# Altium PCB lagd_pcb.PcbDoc (part 3 of 7)
Units mm, origin at the board's own origin, x right, y up, seen from the top; angles counter-clockwise.
Board outline 172 x 145 mm, 6 copper layers (Top Layer, Layer 1, Layer 2, Layer 3, Layer 4, Bottom Layer), stack 0.816 mm thick; 588 components, 338 nets, 2165 pads, 565 vias.
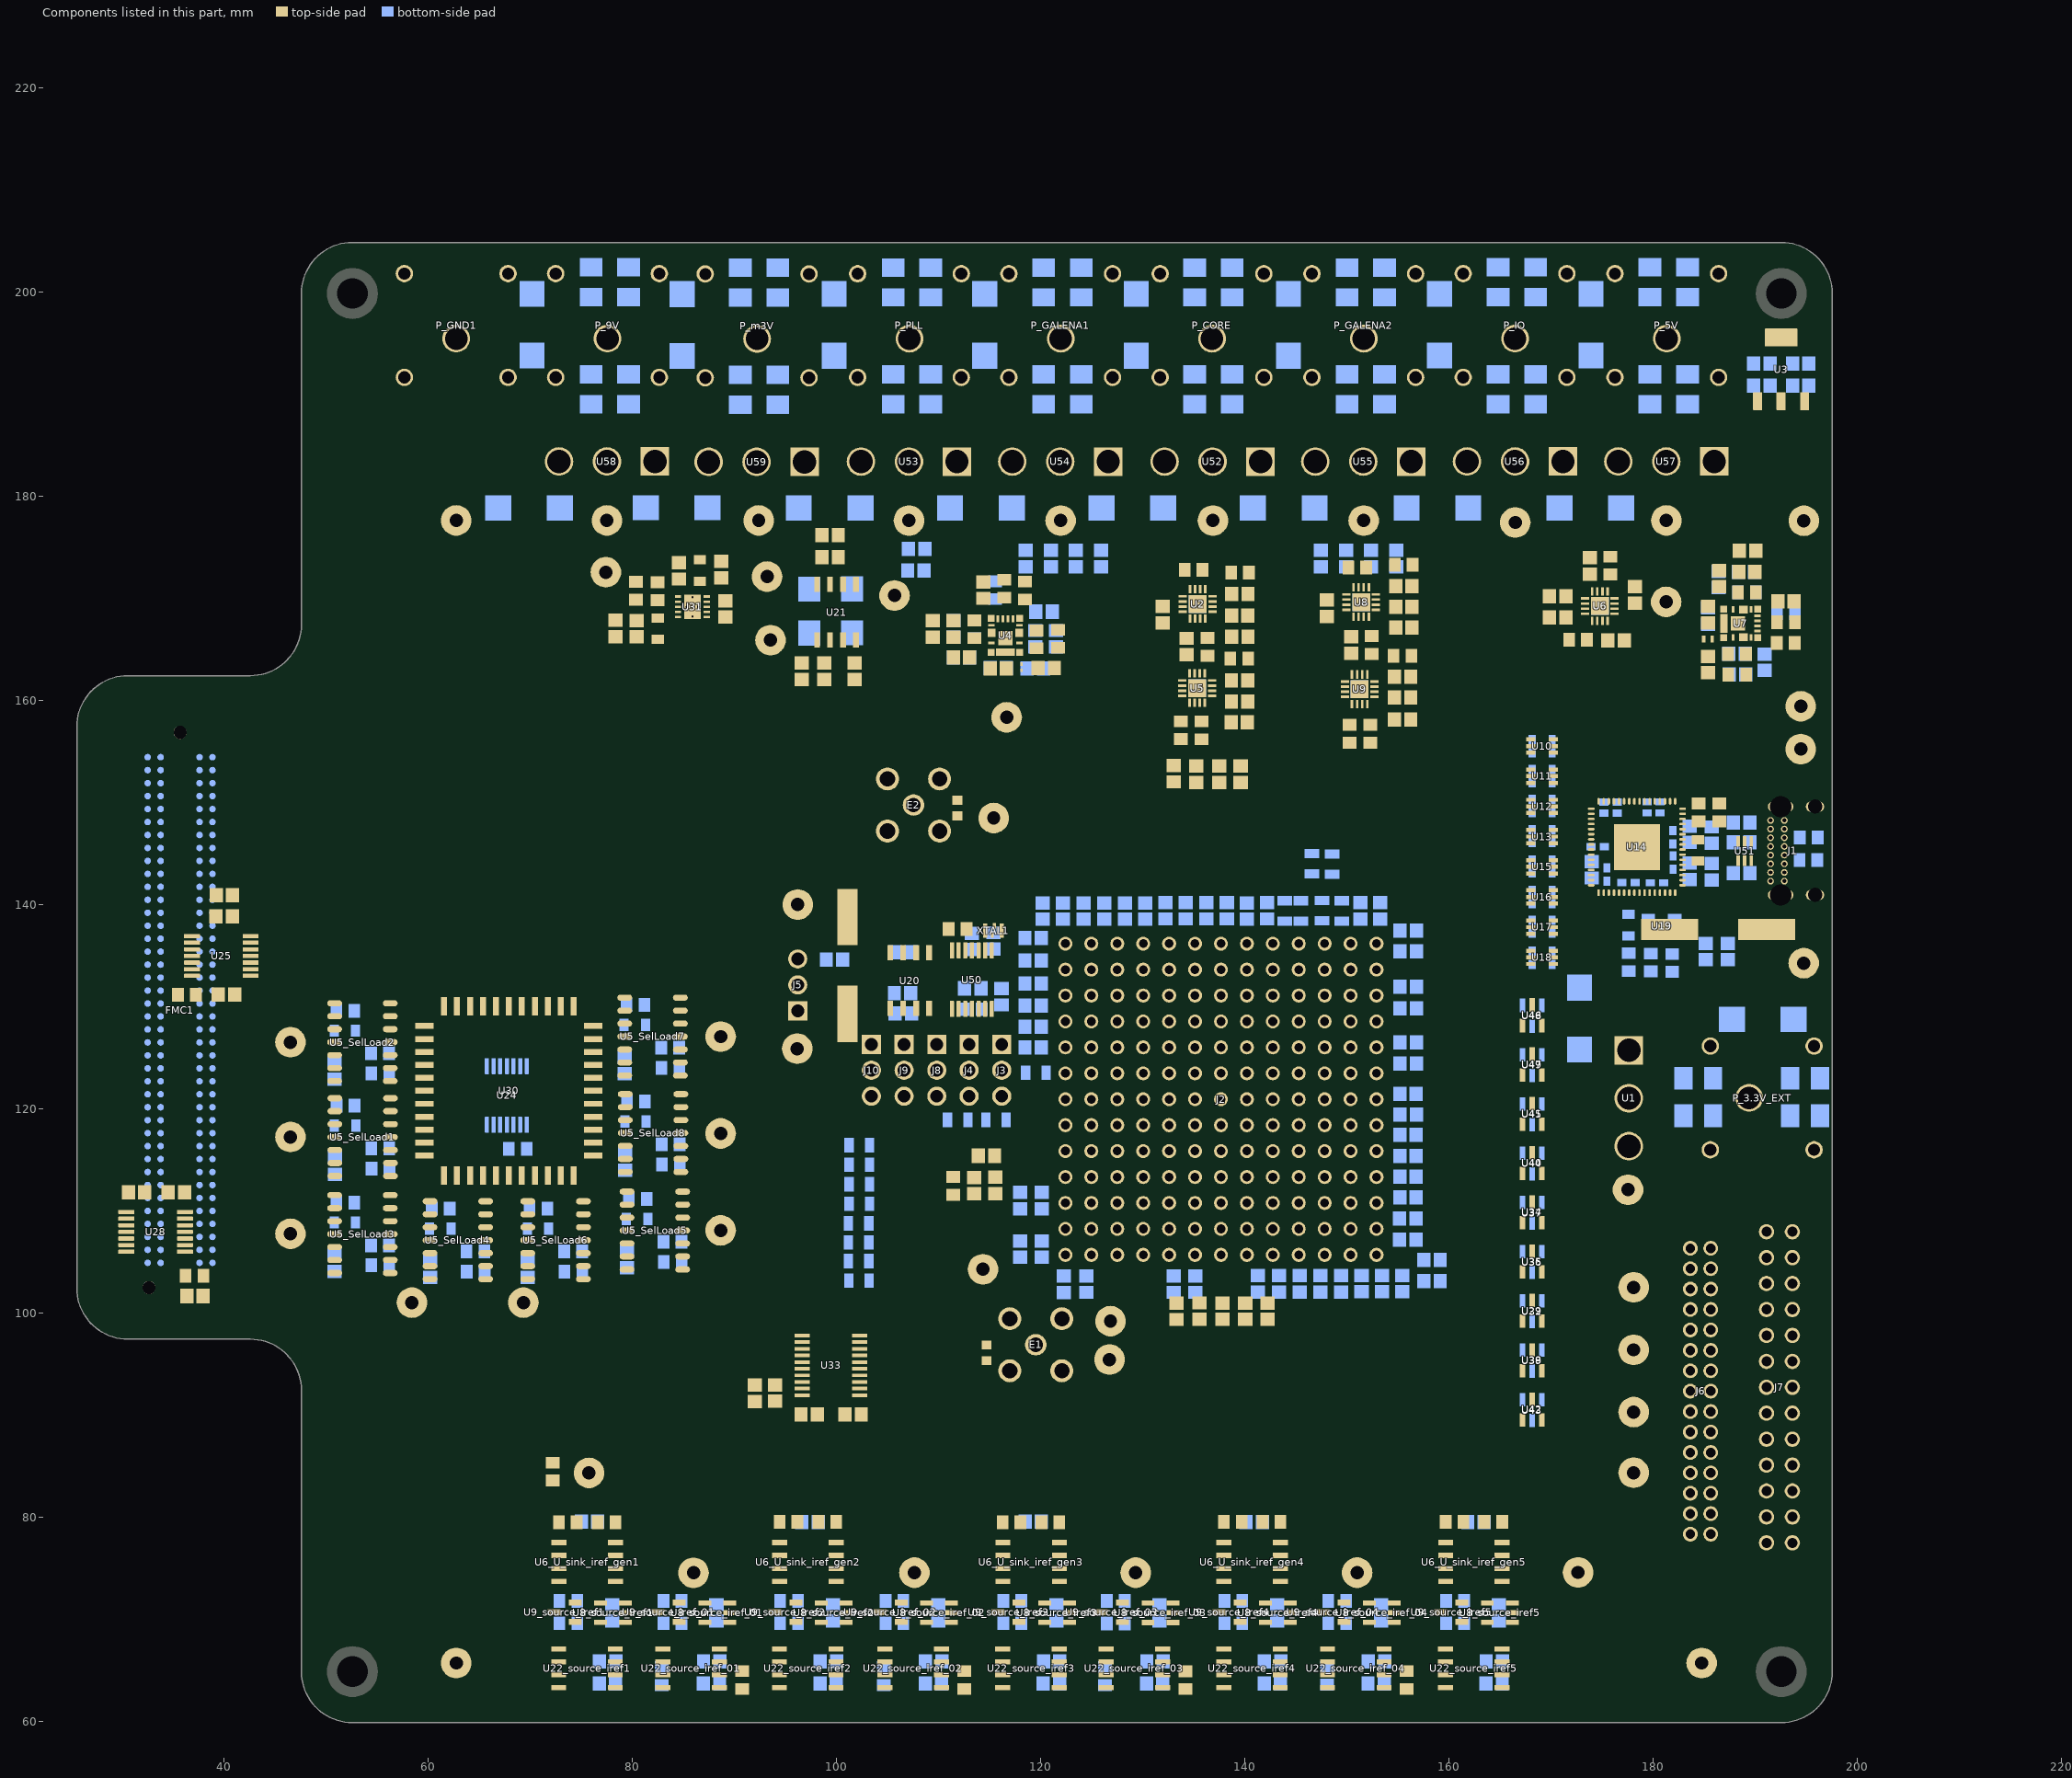
[diagram p6: the components of this part, seen from the top]

## Part data (continued)
J7: "Description", Manufacturer_Name=Sullins, Copyright="Copyright (C) 2025 Ultra Librarian. All rights reserved.", Manufacturer_Part_Number=SBH11-PBPC-D13-ST-BK, RefDes=RefDes, Type=Type
L1: library part LQP03TNR12J02D, "FIXED IND 120NH 40MA 12 OHM SMD", Current Rating (Amps)="80 mA", DC Resistance (DCR)="12Ohm Max", Device Package="0201 (0603 Metric)", Frequency - Self Resonant=800MHz, Inductance Frequency - Test="300 MHz", MANUFACTURER="Murata Electronics", Operating Temperature="-55°C ~ 125°C", Q @ Freq="8 @ 300MHz", Supplier Part Number 1=490-8430-1-ND, Tolerance=±5%, ComponentLink1Description=Datasheet, ComponentLink1URL=https://search.murata.co.jp/Ceramy/image/img/P02/JELF243C-0015.pdf, ComponentLink2Description="DigiKey Link", ComponentLink2URL=https://www.digikey.com/en/products/detail/murata-electronics/LQP03TNR12J02D/2391767, Height - Seated (Max)="0.013\" (0.33mm)", Inductance="120 nH", lastupdated="4/5/2026 8:47:40 PM", Lifecycle Status=Active, Material - Core=Non-Magnetic, Minimum Order=1, Mounting Type="Surface Mount", Package / Case="0201 (0603 Metric)", packaging=TapeAndReel, PART NUMBER=LQP03TNR12J02D, Part Status=Active, partid=615, Price=0.01, series=LQP03, Shielding=Unshielded, Size / Dimension="0.024\" L x 0.012\" W (0.60mm x 0.30mm)", Supplier 1=DigiKey, Supplier Device Package="0201 (0603 Metric)", Type="Thick Film"
L2: library part LQW15CNR33J10D, "FIXED IND 330NH 390MA 0.56OHM SM", Current Rating (Amps)="390 mA", DC Resistance (DCR)="560mOhm Max", Device Package="0402 (1005 Metric)", Frequency - Self Resonant=520MHz, Inductance Frequency - Test="100 MHz", MANUFACTURER="Murata Electronics", Operating Temperature="-55°C ~ 125°C", Supplier Part Number 1=490-16892-1-ND, Tolerance=±5%, ComponentLink1Description=Datasheet, ComponentLink1URL=https://search.murata.co.jp/Ceramy/image/img/P02/JELF243A-0096.pdf, ComponentLink2Description="DigiKey Link", ComponentLink2URL=https://www.digikey.com/en/products/detail/murata-electronics/LQW15CNR33J10D/4906006, Height - Seated (Max)="0.024\" (0.60mm)", Inductance="330 nH", lastupdated="4/5/2026 9:07:19 PM", Lifecycle Status=Active, Material - Core=Ferrite, Minimum Order=1, Mounting Type="Surface Mount", Package / Case="0402 (1005 Metric)", packaging=TapeAndReel, PART NUMBER=LQW15CNR33J10D, Part Status=Active, partid=435, Price=0.17, series=LQW15, Shielding=Unshielded, Size / Dimension="0.039\" L x 0.024\" W (1.00mm x 0.60mm)", Supplier 1=DigiKey, Type="Drum Core, Wirewound"
P_3.3V_EXT P_5V P_9V P_CORE P_GALENA1 P_GALENA2 P_GND1 P_IO P_m3V P_PLL: "Description", Manufacturer_Name=Cliff, Copyright="Copyright (C) 2026 Ultra Librarian. All rights reserved.", Manufacturer_Part_Number=FCR7350R, RefDes=RefDes, Type=Type
R1 R39 R42 R43 R78 R80 R81 R82 R83 R84 R85 R86 R87 R88 R89 R90 R91: "0 Ohms Jumper 0.125W, 1/8W Chip Resistor 0805 (2012 Metric) Automotive AEC-Q200 Thick Film", Package="2012 Vishay", Check_prices=https://www.snapeda.com/parts/CRCW08050000ZSTA/Vishay+Dale/view-part/?ref=eda, MF="Vishay Dale", MP=CRCW08050000ZSTA, SnapEDA_Link=https://www.snapeda.com/parts/CRCW08050000ZSTA/Vishay+Dale/view-part/?ref=snap
R2 R79: "Resistor,Thick Film,50 Ohms,0.1 W,1%,SMT,0603,TCR 37 ppm/DegC,Cut Tape", Package=Package, Check_prices=https://www.snapeda.com/parts/CRCW060350R0FKEA/Vishay/view-part/?ref=eda, MF="Vishay Intertechnology", MP=CRCW060350R0FKEA, SnapEDA_Link=https://www.snapeda.com/parts/CRCW060350R0FKEA/Vishay/view-part/?ref=snap
R3_SelLoad1 R3_SelLoad2 R3_SelLoad3 R3_SelLoad4 R3_SelLoad5 R3_SelLoad6 R3_SelLoad7 R3_SelLoad8: library part AC0805FR-7W1ML, "RES 1 MOHM 1% 1/4W 0805", Device Package="0805 (2012 Metric)", MANUFACTURER=Yageo, Operating Temperature="-55°C ~ 155°C", Power (Watts)="0.25W, 1/4W", Ratings=AEC-Q200, Supplier Device Package=0805, Supplier Part Number 1=13-AC0805FR-7W1MLCT-ND, Temperature Coefficient=±100ppm/°C, Tolerance=±1%, ComponentLink1Description=Datasheet, ComponentLink1URL=https://www.yageo.com/upload/media/product/productsearch/datasheet/rchip/PYu-AC_51_RoHS_L_9.pdf, ComponentLink2Description="DigiKey Link", ComponentLink2URL=https://www.digikey.com/en/products/detail/yageo/AC0805FR-7W1ML/16982127, Composition="Thick Film", Features="Automotive AEC-Q200, Moisture Resistant", Height - Seated (Max)="0.024\" (0.60mm)", lastupdated="4/5/2026 9:17:50 PM", Lifecycle Status=Active, Minimum Order=1, Number of Terminations=2, Package / Case="0805 (2012 Metric)", packaging=TapeAndReel, PART NUMBER=AC0805FR-7W1ML, Part Status=Active, partid=76421, Price=0.01, Resistance="1 MOhms", series=AC, Size / Dimension="0.079\" L x 0.049\" W (2.00mm x 1.25mm)", Supplier 1=DigiKey
R4_SelLoad1 R4_SelLoad2 R4_SelLoad3 R4_SelLoad4 R4_SelLoad5 R4_SelLoad6 R4_SelLoad7 R4_SelLoad8 R19 R28 R32: library part 3430A2F100KTDF, "3430 A2 1% 100K 100PPM 1K RL", Device Package="0805 (2012 Metric)", MANUFACTURER="TE Connectivity Passive Product", Operating Temperature="-55°C ~ 155°C", Power (Watts)=1W, Ratings=AEC-Q200, Supplier Device Package=0508, Supplier Part Number 1=1712-3430A2F100KTDFCT-ND, Temperature Coefficient=±100ppm/°C, Tolerance=±1%, ComponentLink1Description=Datasheet, ComponentLink1URL=https://www.te.com/usa-en/product-4-2176559-1.datasheet.pdf, ComponentLink2Description="DigiKey Link", ComponentLink2URL=https://www.digikey.com/en/products/detail/te-connectivity-passive-product/3430A2F100KTDF/17763668, Composition="Thick Film", Features="Automotive AEC-Q200", Height - Seated (Max)="0.026\" (0.65mm)", lastupdated="4/5/2026 8:08:27 PM", Lifecycle Status=Active, Minimum Order=1, Number of Terminations=2, Package / Case="0805 (2012 Metric)", packaging=TapeAndReel, PART NUMBER=3430A2F100KTDF, Part Status=Active, partid=78438, Price=0.02, Resistance="100 kOhms", series=3430, Size / Dimension="0.049\" L x 0.079\" W (1.25mm x 2.00mm)", Supplier 1=DigiKey
R5_SelLoad1 R5_SelLoad2 R5_SelLoad3 R5_SelLoad4 R5_SelLoad5 R5_SelLoad6 R5_SelLoad7 R5_SelLoad8 R40 R41 R44 R46 R77: library part 3430A2F10KTDF, "3430 A2 1% 10K 100PPM 1K RL", Device Package="0805 (2012 Metric)", MANUFACTURER="TE Connectivity Passive Product", Operating Temperature="-55°C ~ 155°C", Power (Watts)=1W, Ratings=AEC-Q200, Supplier Device Package=0508, Supplier Part Number 1=1712-3430A2F10KTDFCT-ND, Temperature Coefficient=±100ppm/°C, Tolerance=±1%, ComponentLink2Description="DigiKey Link", ComponentLink2URL=https://www.digikey.com/en/products/detail/te-connectivity-passive-product/3430A2F10KTDF/17764190, Composition="Thick Film", Features="Automotive AEC-Q200", Height - Seated (Max)="0.026\" (0.65mm)", lastupdated="4/5/2026 8:08:30 PM", Lifecycle Status=Active, Minimum Order=1, Number of Terminations=2, Package / Case="0805 (2012 Metric)", packaging=TapeAndReel, PART NUMBER=3430A2F10KTDF, Part Status=Active, partid=77781, Price=0.02, Resistance="10 kOhms", series=3430, Size / Dimension="0.049\" L x 0.079\" W (1.25mm x 2.00mm)", Supplier 1=DigiKey
R6_SelLoad1 R6_SelLoad2 R6_SelLoad3 R6_SelLoad4 R6_SelLoad5 R6_SelLoad6 R6_SelLoad7 R6_SelLoad8 R31: library part CHP0805AFX-1001ELF, "RESHIGHPOWERA 0805 1K 1% 1/2W TC", Device Package="0805 (2012 Metric)", MANUFACTURER="Bourns Inc.", Operating Temperature="-55°C ~ 155°C", Power (Watts)="0.5W, 1/2W", Ratings=AEC-Q200, Supplier Device Package=0805, Supplier Part Number 1=118-CHP0805AFX-1001ELFCT-ND, Temperature Coefficient=±100ppm/°C, Tolerance=±1%, ComponentLink1Description=Datasheet, ComponentLink1URL=https://www.bourns.com/docs/product-datasheets/chp-a.pdf, ComponentLink2Description="DigiKey Link", ComponentLink2URL=https://www.digikey.com/en/products/detail/bourns-inc/CHP0805AFX-1001ELF/12144379, Composition="Thick Film", Features="Anti-Sulfur, Automotive AEC-Q200, Moisture Resistant, Pulse Withstanding", Height - Seated (Max)="0.024\" (0.60mm)", lastupdated="4/5/2026 8:09:01 PM", Lifecycle Status=Active, Minimum Order=1, Number of Terminations=2, Package / Case="0805 (2012 Metric)", packaging=TapeAndReel, PART NUMBER=CHP0805AFX-1001ELF, Part Status=Active, partid=66642, Price=0.08, Resistance="1 kOhms", series=CHP-A, Size / Dimension="0.079\" L x 0.049\" W (2.00mm x 1.25mm)", Supplier 1=DigiKey
R7_source_iref1 R7_source_iref2 R7_source_iref3 R7_source_iref4 R7_source_iref5 R7_source_iref_01 R7_source_iref_02 R7_source_iref_03 R7_source_iref_04: library part RCS0805100RFKEA, "RES SMD 100 OHM 1% 3/4W 0805", Device Package="0805 (2012 Metric)", MANUFACTURER="Vishay Dale", Operating Temperature="-55°C ~ 155°C", Power (Watts)="0.75W, 3/4W", Ratings=AEC-Q200, Supplier Device Package=0805, Supplier Part Number 1=541-2834-1-ND, Temperature Coefficient=±100ppm/°C, Tolerance=±1%, ComponentLink1Description=Datasheet, ComponentLink1URL=http://www.vishay.com/docs/20065/rcse3.pdf, ComponentLink2Description="DigiKey Link", ComponentLink2URL=https://www.digikey.com/en/products/detail/vishay-dale/RCS0805100RFKEA/5866980, Composition="Thick Film", Features="Automotive AEC-Q200, Pulse Withstanding", Height - Seated (Max)="0.020\" (0.50mm)", lastupdated="4/5/2026 8:11:26 PM", Lifecycle Status=Active, Minimum Order=1, Number of Terminations=2, Package / Case="0805 (2012 Metric)", packaging=TapeAndReel, PART NUMBER=RCS0805100RFKEA, Part Status=Active, partid=27784, Price=0.02, Resistance="100 Ohms", series="RCS e3", Size / Dimension="0.079\" L x 0.049\" W (2.00mm x 1.25mm)", Supplier 1=DigiKey
R8_source_iref1 R8_source_iref2 R8_source_iref3 R8_source_iref4 R8_source_iref5 R8_source_iref_01 R8_source_iref_02 R8_source_iref_03 R8_source_iref_04: library part RNCS0805BKE10K0, "RES 10K OHM 0.1% 1/10W 0805", Device Package="0805 (2012 Metric)", MANUFACTURER="Stackpole Electronics Inc", Operating Temperature="-55°C ~ 155°C", Power (Watts)="0.1W, 1/10W", Ratings=AEC-Q200, Supplier Device Package=0805, Supplier Part Number 1=RNCS0805BKE10K0CT-ND, Temperature Coefficient=±25ppm/°C, Tolerance=±0.1%, ComponentLink1Description=Datasheet, ComponentLink1URL=https://www.seielect.com/catalog/sei-rncs_rnch.pdf, ComponentLink2Description="DigiKey Link", ComponentLink2URL=https://www.digikey.com/en/products/detail/stackpole-electronics-inc/RNCS0805BKE10K0/1800067, Composition="Thin Film", Features="Anti-Corrosive, Automotive AEC-Q200, Moisture Resistant", Height - Seated (Max)="0.026\" (0.65mm)", lastupdated="4/5/2026 8:11:26 PM", Lifecycle Status=Active, Minimum Order=1, Number of Terminations=2, Package / Case="0805 (2012 Metric)", packaging=TapeAndReel, PART NUMBER=RNCS0805BKE10K0, Part Status=Active, partid=27713, Price=0.07, Resistance="10 kOhms", series=RNCS, Size / Dimension="0.079\" L x 0.049\" W (2.00mm x 1.25mm)", Supplier 1=DigiKey
R9 R13 R23 R27 R48 R50 R69 R70 R73: library part 560112120019, "RES 5.1K OHM 5% 1/4W 0805", Device Package="0805 (2012 Metric)", MANUFACTURER="Würth Elektronik", Operating Temperature="-55°C ~ 155°C", Power (Watts)="0.25W, 1/4W", Supplier Device Package=0805, Supplier Part Number 1=732-560112120019CT-ND, Temperature Coefficient=±100ppm/°C, Tolerance=±5%, ComponentLink1Description=Datasheet, ComponentLink1URL=https://www.we-online.com/katalog/datasheet/560112120019.pdf, ComponentLink2Description="DigiKey Link", ComponentLink2URL=https://www.digikey.com/en/products/detail/würth-elektronik/560112120019/22230497, Composition="Thick Film", Features=Anti-Sulfur, Height - Seated (Max)="0.026\" (0.65mm)", lastupdated="4/6/2026 8:09:43 PM", Lifecycle Status=Active, Minimum Order=1, Number of Terminations=2, Package / Case="0805 (2012 Metric)", packaging=TapeAndReel, PART NUMBER=560112120019, partid=95975, Price=0.03, Resistance="5.1 kOhms", series=WRIS-RSKS, Size / Dimension="0.079\" L x 0.049\" W (2.00mm x 1.25mm)", Supplier 1=DigiKey
R10 R18 R30 R76: library part CSSH0805FT2L00, "RES 0.002 OHM 1% 1W 0805", Device Package="0805 (2012 Metric)", MANUFACTURER="Stackpole Electronics Inc", Operating Temperature="-55°C ~ 170°C", Power (Watts)=1W, Ratings=AEC-Q200, Supplier Device Package=0805, Supplier Part Number 1=738-CSSH0805FT2L00CT-ND, Temperature Coefficient=±100ppm/°C, Tolerance=±1%, ComponentLink2Description="DigiKey Link", ComponentLink2URL=https://www.digikey.com/en/products/detail/stackpole-electronics-inc/CSSH0805FT2L00/10719360, Composition="Metal Element", Features="Automotive AEC-Q200, Current Sense", Height - Seated (Max)="0.026\" (0.67mm)", lastupdated="4/5/2026 8:09:20 PM", Lifecycle Status=Active, Minimum Order=1, Number of Terminations=2, Package / Case="0805 (2012 Metric)", packaging=TapeAndReel, PART NUMBER=CSSH0805FT2L00, Part Status=Active, partid=50073, Price=0.13, Resistance="2 mOhms", series=CSSH, Size / Dimension="0.083\" L x 0.059\" W (2.10mm x 1.50mm)", Supplier 1=DigiKey
R11 R24: library part 3-2176094-0, "RES SMD 243K OHM 0.1% 1/4W 0805", Device Package="0805 (2012 Metric)", MANUFACTURER="TE Connectivity Passive Product", Operating Temperature="-55°C ~ 155°C", Power (Watts)="0.25W, 1/4W", Supplier Device Package=0805, Supplier Part Number 1=A110772CT-ND, Temperature Coefficient=±25ppm/°C, Tolerance=±0.1%, ComponentLink1Description=Datasheet, ComponentLink1URL=https://www.te.com/commerce/DocumentDelivery/DDEController?Action=srchrtrv&DocNm=1773272&DocType=DS&DocLang=English, ComponentLink2Description="DigiKey Link", ComponentLink2URL=https://www.digikey.com/en/products/detail/te-connectivity-passive-product/3-2176094-0/4034240, Composition="Thin Film", Height - Seated (Max)="0.026\" (0.65mm)", lastupdated="4/5/2026 8:09:55 PM", Lifecycle Status=Active, Minimum Order=1, Number of Terminations=2, Package / Case="0805 (2012 Metric)", packaging=TapeAndReel, PART NUMBER=3-2176094-0, Part Status=Active, partid=46793, Price=0.17, Resistance="243 kOhms", series="RP73P, Holsworthy", Size / Dimension="0.079\" L x 0.049\" W (2.00mm x 1.25mm)", Supplier 1=DigiKey
R12 R16 R20 R26 R29 R34 R35 R36: library part 9-2176375-1, "RES 10K OHM 0.1% 1/5W 0805", Device Package="0805 (2012 Metric)", MANUFACTURER="TE Connectivity Passive Product", Operating Temperature="-55°C ~ 155°C", Power (Watts)="0.2W, 1/5W", Ratings=AEC-Q200, Supplier Device Package=0805, Supplier Part Number 1=1712-9-2176375-1CT-ND, Temperature Coefficient=±10ppm/°C, Tolerance=±0.1%, ComponentLink1Description=Datasheet, ComponentLink1URL=https://www.te.com/usa-en/product-9-2176375-1.datasheet.pdf, ComponentLink2Description="DigiKey Link", ComponentLink2URL=https://www.digikey.com/en/products/detail/te-connectivity-passive-product/9-2176375-1/18110542, Composition="Thin Film", Features="Anti-Sulfur, Automotive AEC-Q200, Moisture Resistant", Height - Seated (Max)="0.026\" (0.65mm)", lastupdated="4/5/2026 8:08:39 PM", Lifecycle Status=Active, Minimum Order=1, Number of Terminations=2, Package / Case="0805 (2012 Metric)", packaging=TapeAndReel, PART NUMBER=9-2176375-1, Part Status=Active, partid=76290, Price=0.35, Resistance="10 kOhms", series=RQ73, Size / Dimension="0.079\" L x 0.049\" W (2.00mm x 1.25mm)", Supplier 1=DigiKey
R14 R15 R74 R75: library part 2-2176093-0, "RES SMD 15K OHM 0.1% 1/4W 0805", Device Package="0805 (2012 Metric)", MANUFACTURER="TE Connectivity Passive Product", Operating Temperature="-55°C ~ 155°C", Power (Watts)="0.25W, 1/4W", Supplier Device Package=0805, Supplier Part Number 1=A110656CT-ND, Temperature Coefficient=±25ppm/°C, Tolerance=±0.1%, ComponentLink1Description=Datasheet, ComponentLink1URL=https://www.te.com/commerce/DocumentDelivery/DDEController?Action=srchrtrv&DocNm=1773272&DocType=DS&DocLang=English, ComponentLink2Description="DigiKey Link", ComponentLink2URL=https://www.digikey.com/en/products/detail/te-connectivity-passive-product/2-2176093-0/4034124, Composition="Thin Film", Height - Seated (Max)="0.026\" (0.65mm)", lastupdated="4/5/2026 8:10:12 PM", Lifecycle Status=Active, Minimum Order=1, Number of Terminations=2, Package / Case="0805 (2012 Metric)", packaging=TapeAndReel, PART NUMBER=2-2176093-0, Part Status=Active, partid=44076, Price=0.14, Resistance="15 kOhms", series="RP73P, Holsworthy", Size / Dimension="0.079\" L x 0.049\" W (2.00mm x 1.25mm)", Supplier 1=DigiKey
R17: library part 3430A2F36KTDF, "3430 A2 1% 36K 100PPM 1K RL", Device Package="0805 (2012 Metric)", MANUFACTURER="TE Connectivity Passive Product", Operating Temperature="-55°C ~ 155°C", Power (Watts)=1W, Ratings=AEC-Q200, Supplier Device Package=0508, Supplier Part Number 1=1712-3430A2F36KTDFCT-ND, Temperature Coefficient=±100ppm/°C, Tolerance=±1%, ComponentLink2Description="DigiKey Link", ComponentLink2URL=https://www.digikey.com/en/products/detail/te-connectivity-passive-product/3430A2F36KTDF/17763376, Composition="Thick Film", Features="Automotive AEC-Q200", Height - Seated (Max)="0.026\" (0.65mm)", lastupdated="4/5/2026 8:08:39 PM", Lifecycle Status=Active, Minimum Order=1, Number of Terminations=2, Package / Case="0805 (2012 Metric)", packaging=TapeAndReel, PART NUMBER=3430A2F36KTDF, Part Status=Active, partid=76291, Price=0.02, Resistance="36 kOhms", series=3430, Size / Dimension="0.049\" L x 0.079\" W (1.25mm x 2.00mm)", Supplier 1=DigiKey
R21 R71: library part 1-2176093-2, "RES SMD 12.1K OHM 0.1% 1/4W 0805", Device Package="0805 (2012 Metric)", MANUFACTURER="TE Connectivity Passive Product", Operating Temperature="-55°C ~ 155°C", Power (Watts)="0.25W, 1/4W", Supplier Device Package=0805, Supplier Part Number 1=A110647CT-ND, Temperature Coefficient=±25ppm/°C, Tolerance=±0.1%, ComponentLink1Description=Datasheet, ComponentLink1URL=https://www.te.com/commerce/DocumentDelivery/DDEController?Action=srchrtrv&DocNm=1773272&DocType=DS&DocLang=English, ComponentLink2Description="DigiKey Link", ComponentLink2URL=https://www.digikey.com/en/products/detail/te-connectivity-passive-product/1-2176093-2/4034115, Composition="Thin Film", Height - Seated (Max)="0.026\" (0.65mm)", lastupdated="4/5/2026 8:09:25 PM", Lifecycle Status=Active, Minimum Order=1, Number of Terminations=2, Package / Case="0805 (2012 Metric)", packaging=TapeAndReel, PART NUMBER=1-2176093-2, Part Status=Active, partid=49448, Price=0.15, Resistance="12.1 kOhms", series="RP73P, Holsworthy", Size / Dimension="0.079\" L x 0.049\" W (2.00mm x 1.25mm)", Supplier 1=DigiKey
R22 R72: library part 7-2176092-8, "RES SMD 4.99K OHM 0.1% 1/4W 0805", Device Package="0805 (2012 Metric)", MANUFACTURER="TE Connectivity Passive Product", Operating Temperature="-55°C ~ 155°C", Power (Watts)="0.25W, 1/4W", Supplier Device Package=0805, Supplier Part Number 1=A110610CT-ND, Temperature Coefficient=±25ppm/°C, Tolerance=±0.1%, ComponentLink1Description=Datasheet, ComponentLink1URL=https://www.te.com/commerce/DocumentDelivery/DDEController?Action=srchrtrv&DocNm=1773272&DocType=DS&DocLang=English, ComponentLink2Description="DigiKey Link", ComponentLink2URL=https://www.digikey.com/en/products/detail/te-connectivity-passive-product/7-2176092-8/4034078, Composition="Thin Film", Height - Seated (Max)="0.026\" (0.65mm)", lastupdated="4/5/2026 8:10:59 PM", Lifecycle Status=Active, Minimum Order=1, Number of Terminations=2, Package / Case="0805 (2012 Metric)", packaging=TapeAndReel, PART NUMBER=7-2176092-8, Part Status=Active, partid=34159, Price=0.14, Resistance="4.99 kOhms", series="RP73P, Holsworthy", Size / Dimension="0.079\" L x 0.049\" W (2.00mm x 1.25mm)", Supplier 1=DigiKey
R25: library part 4-2176093-8, "RES SMD 30.1K OHM 0.1% 1/4W 0805", Device Package="0805 (2012 Metric)", MANUFACTURER="TE Connectivity Passive Product", Operating Temperature="-55°C ~ 155°C", Power (Watts)="0.25W, 1/4W", Supplier Device Package=0805, Supplier Part Number 1=A110685CT-ND, Temperature Coefficient=±25ppm/°C, Tolerance=±0.1%, ComponentLink1Description=Datasheet, ComponentLink1URL=https://www.te.com/commerce/DocumentDelivery/DDEController?Action=srchrtrv&DocNm=1773272&DocType=DS&DocLang=English, ComponentLink2Description="DigiKey Link", ComponentLink2URL=https://www.digikey.com/en/products/detail/te-connectivity-passive-product/4-2176093-8/4034153, Composition="Thin Film", Height - Seated (Max)="0.026\" (0.65mm)", lastupdated="4/5/2026 8:09:45 PM", Lifecycle Status=Active, Minimum Order=1, Number of Terminations=2, Package / Case="0805 (2012 Metric)", packaging=TapeAndReel, PART NUMBER=4-2176093-8, Part Status=Active, partid=47580, Price=0.13, Resistance="30.1 kOhms", series="RP73P, Holsworthy", Size / Dimension="0.079\" L x 0.049\" W (2.00mm x 1.25mm)", Supplier 1=DigiKey
R33: library part AC0805FR-0712KL, "RES SMD 12K OHM 1% 1/8W 0805", Device Package="0805 (2012 Metric)", MANUFACTURER=Yageo, Operating Temperature="-55°C ~ 155°C", Power (Watts)="0.125W, 1/8W", Ratings=AEC-Q200, Supplier Device Package=0805, Supplier Part Number 1=YAG3692CT-ND, Temperature Coefficient=±100ppm/°C, Tolerance=±1%, ComponentLink1Description=Datasheet, ComponentLink1URL=https://www.yageo.com/upload/media/product/productsearch/datasheet/rchip/PYu-AC_51_RoHS_L_7.pdf, ComponentLink2Description="DigiKey Link", ComponentLink2URL=https://www.digikey.com/en/products/detail/yageo/AC0805FR-0712KL/5896550, Composition="Thick Film", Features="Automotive AEC-Q200, Moisture Resistant", Height - Seated (Max)="0.024\" (0.60mm)", lastupdated="4/5/2026 9:18:17 PM", Lifecycle Status=Active, Minimum Order=1, Number of Terminations=2, Package / Case="0805 (2012 Metric)", packaging=TapeAndReel, PART NUMBER=AC0805FR-0712KL, Part Status=Active, partid=31694, Price=0.01, Resistance="12 kOhms", series=AC, Size / Dimension="0.079\" L x 0.049\" W (2.00mm x 1.25mm)", Supplier 1=DigiKey
R37: library part AC0805FR-102KL, "RES 2K OHM 1% 1/8W 0805", Device Package="0805 (2012 Metric)", MANUFACTURER=Yageo, Operating Temperature="-55°C ~ 155°C", Power (Watts)="0.125W, 1/8W", Ratings=AEC-Q200, Supplier Device Package=0805, Supplier Part Number 1=13-AC0805FR-102KLCT-ND, Temperature Coefficient=±100ppm/°C, Tolerance=±1%, ComponentLink1Description=Datasheet, ComponentLink1URL=https://www.yageo.com/upload/media/product/productsearch/datasheet/rchip/PYu-AC_51_RoHS_L_8.pdf, ComponentLink2Description="DigiKey Link", ComponentLink2URL=https://www.digikey.com/en/products/detail/yageo/AC0805FR-102KL/14008292, Composition="Thick Film", Height - Seated (Max)="0.024\" (0.60mm)", lastupdated="4/5/2026 9:17:54 PM", Lifecycle Status=Active, Minimum Order=1, Number of Terminations=2, Package / Case="0805 (2012 Metric)", packaging=TapeAndReel, PART NUMBER=AC0805FR-102KL, Part Status=Active, partid=66655, Price=0.01, Resistance="2 kOhms", series=AC, Size / Dimension="0.079\" L x 0.049\" W (2.00mm x 1.25mm)", Supplier 1=DigiKey
R38: library part 560112120002, "RES 0 OHM JUMPER 0805", Device Package="0805 (2012 Metric)", MANUFACTURER="Würth Elektronik", Operating Temperature="-55°C ~ 155°C", Supplier Device Package=0805, Supplier Part Number 1=732-560112120002CT-ND, Tolerance=Jumper, ComponentLink1Description=Datasheet, ComponentLink1URL=https://www.we-online.com/katalog/datasheet/560112120002.pdf, ComponentLink2Description="DigiKey Link", ComponentLink2URL=https://www.digikey.com/en/products/detail/würth-elektronik/560112120002/22230691, Composition="Thick Film", Features=Anti-Sulfur, Height - Seated (Max)="0.026\" (0.65mm)", lastupdated="4/6/2026 8:09:42 PM", Lifecycle Status=Active, Minimum Order=1, Number of Terminations=2, Package / Case="0805 (2012 Metric)", packaging=TapeAndReel, PART NUMBER=560112120002, partid=95962, Price=0.03, Resistance="0 Ohms", series=WRIS-RSKS, Size / Dimension="0.079\" L x 0.049\" W (2.00mm x 1.25mm)", Supplier 1=DigiKey
R45: library part CRGP0805F47K, "RES 47K OHM 1% 1/3W 0805", Device Package="0805 (2012 Metric)", MANUFACTURER="TE Connectivity Passive Product", Operating Temperature="-55°C ~ 155°C", Power (Watts)="0.333W, 1/3W", Supplier Device Package=0805, Supplier Part Number 1=A130497CT-ND, Temperature Coefficient=±100ppm/°C, Tolerance=±1%, ComponentLink1Description=Datasheet, ComponentLink1URL=https://www.te.com/commerce/DocumentDelivery/DDEController?Action=srchrtrv&DocNm=9-1773463-9&DocType=DS&DocLang=English, ComponentLink2Description="DigiKey Link", ComponentLink2URL=https://www.digikey.com/en/products/detail/te-connectivity-passive-product/CRGP0805F47K/8577099, Composition="Thick Film", Features="Automotive AEC-Q200, Pulse Withstanding", Height - Seated (Max)="0.026\" (0.65mm)", lastupdated="4/5/2026 8:11:22 PM", Lifecycle Status=Active, Minimum Order=1, Number of Terminations=2, Package / Case="0805 (2012 Metric)", packaging=TapeAndReel, PART NUMBER=CRGP0805F47K, Part Status=Active, partid=28741, Price=0.03, Resistance="47 kOhms", series=CRGP, Size / Dimension="0.079\" L x 0.049\" W (2.00mm x 1.25mm)", Supplier 1=DigiKey
R47: library part AC0805FR-7W4K7L, "RES 4.7K OHM 1% 1/4W 0805", Device Package="0805 (2012 Metric)", MANUFACTURER=Yageo, Operating Temperature="-55°C ~ 155°C", Power (Watts)="0.25W, 1/4W", Ratings=AEC-Q200, Supplier Device Package=0805, Supplier Part Number 1=13-AC0805FR-7W4K7LCT-ND, Temperature Coefficient=±100ppm/°C, Tolerance=±1%, ComponentLink1Description=Datasheet, ComponentLink1URL=https://www.yageo.com/upload/media/product/productsearch/datasheet/rchip/PYu-AC_51_RoHS_L_9.pdf, ComponentLink2Description="DigiKey Link", ComponentLink2URL=https://www.digikey.com/en/products/detail/yageo/AC0805FR-7W4K7L/16989051, Composition="Thick Film", Features="Automotive AEC-Q200, Moisture Resistant", Height - Seated (Max)="0.024\" (0.60mm)", lastupdated="4/5/2026 9:17:50 PM", Lifecycle Status=Active, Minimum Order=1, Number of Terminations=2, Package / Case="0805 (2012 Metric)", packaging=TapeAndReel, PART NUMBER=AC0805FR-7W4K7L, Part Status=Active, partid=77750, Price=0.01, Resistance="4.7 kOhms", series=AC, Size / Dimension="0.079\" L x 0.049\" W (2.00mm x 1.25mm)", Supplier 1=DigiKey
R49: library part AC0805FR-7W3K3L, "RES 3.3K OHM 1% 1/4W 0805", Device Package="0805 (2012 Metric)", MANUFACTURER=Yageo, Operating Temperature="-55°C ~ 155°C", Power (Watts)="0.25W, 1/4W", Ratings=AEC-Q200, Supplier Device Package=0805, Supplier Part Number 1=13-AC0805FR-7W3K3LCT-ND, Temperature Coefficient=±100ppm/°C, Tolerance=±1%, ComponentLink1Description=Datasheet, ComponentLink1URL=https://www.yageo.com/upload/media/product/productsearch/datasheet/rchip/PYu-AC_51_RoHS_L_9.pdf, ComponentLink2Description="DigiKey Link", ComponentLink2URL=https://www.digikey.com/en/products/detail/yageo/AC0805FR-7W3K3L/16982191, Composition="Thick Film", Features="Automotive AEC-Q200, Moisture Resistant", Height - Seated (Max)="0.024\" (0.60mm)", lastupdated="4/5/2026 9:17:50 PM", Lifecycle Status=Active, Minimum Order=1, Number of Terminations=2, Package / Case="0805 (2012 Metric)", packaging=TapeAndReel, PART NUMBER=AC0805FR-7W3K3L, Part Status=Active, partid=76420, Price=0.01, Resistance="3.3 kOhms", series=AC, Size / Dimension="0.079\" L x 0.049\" W (2.00mm x 1.25mm)", Supplier 1=DigiKey
R51 R52 R53 R54 R55 R56 R57 R58 R59 R60 R61 R62 R63 R64 R65 R66 R67 R68: library part 2-2176091-4, "RES SMD 100 OHM 0.1% 1/4W 0805", Device Package="0805 (2012 Metric)", MANUFACTURER="TE Connectivity Passive Product", Operating Temperature="-55°C ~ 155°C", Power (Watts)="0.25W, 1/4W", Supplier Device Package=0805, Supplier Part Number 1=A110447CT-ND, Temperature Coefficient=±25ppm/°C, Tolerance=±0.1%, ComponentLink1Description=Datasheet, ComponentLink1URL=https://www.te.com/commerce/DocumentDelivery/DDEController?Action=srchrtrv&DocNm=1773272&DocType=DS&DocLang=English, ComponentLink2Description="DigiKey Link", ComponentLink2URL=https://www.digikey.com/en/products/detail/te-connectivity-passive-product/2-2176091-4/4033915, Composition="Thin Film", Height - Seated (Max)="0.026\" (0.65mm)", lastupdated="4/5/2026 8:11:23 PM", Lifecycle Status=Active, Minimum Order=1, Number of Terminations=2, Package / Case="0805 (2012 Metric)", packaging=TapeAndReel, PART NUMBER=2-2176091-4, Part Status=Active, partid=28489, Price=0.13, Resistance="100 Ohms", series="RP73P, Holsworthy", Size / Dimension="0.079\" L x 0.049\" W (2.00mm x 1.25mm)", Supplier 1=DigiKey
U1 U52 U53 U54 U55 U56 U57 U58 U59: "Description", Manufacturer_Name="C&K Components", Copyright="Copyright (C) 2025 Ultra Librarian. All rights reserved.", Manufacturer_Part_Number=1101M2S3CQE2, RefDes=RefDes, Type=Type
U2 U4 U5 U6 U7 U8 U9: "No Description Available", Mfr_Name="Texas Instruments", RefDes=RefDes
  U2 U5 U6 U8 U9: Type=Type
  U4 U7: Type=TYPE
U3: library part CMP-0395-00535-2, "Single Output Low Noise LDO, 1.5 A, Fixed 3.3 V Output, 2.1 to 20 V Input, 4-pin SOT-223 (DCY), -40 to 125 degC, Green (RoHS & no Sb/Br)", MANUFACTURER="Texas Instruments", Accuracy(%)=3, Code_JEDEC=TO-261, ComponentLink1Description="Manufacturer URL", ComponentLink1URL=http://www.ti.com/, ComponentLink2Description=Datasheet, ComponentLink2URL=http://www.ti.com/general/docs/lit/getliterature.tsp?genericPartNumber=TL1963A-33&fileType=pdf, ComponentLink3Description="Package Specification", ComponentLink3URL=http://www.ti.com/litv/pdf/mpds094a, DatasheetVersion=SLVS719F, Eco-Plan="Green (RoHS & no Sb/Br)", Fixed Output Options(V)=3.3, Iout(Max)(A)=1.5, Iq(Typ)(mA)=1, Mounting Technology="Surface Mount", PackageDescription="4-Pin Plastic Small Outline, Body 3.5 x 6.5 mm, Pitch 2.3 mm", PackageReference=DCY0004A, PackageVersion=4202506/B, PartNumber=TL1963A-33DCYR, SubFamily="Single Channel LDO", Vdo(Typ)(mV)=340, Vin(Max)(V)=20, Vin(Min)(V)=2.1, Vout Adj(Max)(V)=3.3, Vout Adj(Min)(V)=3.3
U5_SelLoad1 U5_SelLoad2 U5_SelLoad3 U5_SelLoad4 U5_SelLoad5 U5_SelLoad6 U5_SelLoad7 U5_SelLoad8: "10-pA on-state leakage current, 20-V, 1:1 (SPST), 4-channel analog switch 14-SOIC -55 to 125", Manufacturer_Name="Texas Instruments", Copyright="Copyright (C) 2026 Ultra Librarian. All rights reserved.", Manufacturer_Part_Number=CD4066BM96, RefDes=RefDes, Type=TYPE
U6_U_sink_iref_gen1 U6_U_sink_iref_gen2 U6_U_sink_iref_gen3 U6_U_sink_iref_gen4 U6_U_sink_iref_gen5 U22_source_iref1 U22_source_iref2 U22_source_iref3 U22_source_iref4 U22_source_iref5 U22_source_iref_01 U22_source_iref_02 U22_source_iref_03 U22_source_iref_04: "No Description Available", Manufacturer_Name="Advanced Linear Devices", Copyright="Copyright (C) 2026 Ultra Librarian. All rights reserved.", RefDes=RefDes, Type=Type
  U6_U_sink_iref_gen1 U6_U_sink_iref_gen2 U6_U_sink_iref_gen3 U6_U_sink_iref_gen4 U6_U_sink_iref_gen5: Manufacturer_Part_Number=ALD1101ASAL
  U22_source_iref1 U22_source_iref2 U22_source_iref3 U22_source_iref4 U22_source_iref5 U22_source_iref_01 U22_source_iref_02 U22_source_iref_03 U22_source_iref_04: Manufacturer_Part_Number=ALD1117SAL
U8_source_iref1 U8_source_iref2 U8_source_iref3 U8_source_iref4 U8_source_iref5 U8_source_iref_01 U8_source_iref_02 U8_source_iref_03 U8_source_iref_04: "Single, 5.5-V, 10-MHz, RRIO operational amplifier for cost-optimized applications 5-SOT-23 -40 to 125", Manufacturer_Name="Texas Instruments", Copyright="Copyright (C) 2026 Ultra Librarian. All rights reserved.", Manufacturer_Part_Number=TLV9061IDBVR, RefDes=RefDes, Type=Type
U9_source_iref1 U9_source_iref2 U9_source_iref3 U9_source_iref4 U9_source_iref5 U9_source_iref_01 U9_source_iref_02 U9_source_iref_03 U9_source_iref_04 U29 U32 U34 U35 U36 U37 U38 U39 U40 U41 U42 U43 U44 U45 U46 U47 U48 U49 U51: "Description", Manufacturer_Name=onsemi, Copyright="Copyright (C) 2025 Ultra Librarian. All rights reserved.", RefDes=RefDes, Type=Type
  U9_source_iref1 U9_source_iref2 U9_source_iref3 U9_source_iref4 U9_source_iref5 U9_source_iref_01 U9_source_iref_02 U9_source_iref_03 U9_source_iref_04: Manufacturer_Part_Number=BSS138
  U29 U32 U34 U35 U36 U37 U38 U39 U40 U41 U42 U43 U44 U45 U46 U47 U48 U49: Manufacturer_Part_Number=BAT54LT1G
  U51: Manufacturer_Part_Number=NUP2202W1T2G
U14: library part CMP-0078-00005-3, "Quad High Speed USB To Multipurpose UART/MPSSE IC, 64-pin QFN, Tape and Reel", MANUFACTURER=FTDI, ComponentLink1Description="Manufacturer URL", ComponentLink1URL=http://www.ftdichip.com/, ComponentLink2Description=Datasheet, ComponentLink2URL=http://www.ftdichip.com/Support/Documents/DataSheets/ICs/DS_FT4232H.pdf, DatasheetVersion="ver 2.2, Jan-2012", PackageDescription="64-Pin Quad Flat No-Lead, 9 x 9 mm Body, 0.5 mm Pitch, 4.35 x 4.35 mm Exposed Pad", PackageReference=QFN64_2, PackageVersion=Jan-12, PartNumber=FT4232HQ-Reel, RevisionNote="DatasheetVersion updated to 2.2 Jan-2012"
U19: library part 93LC56BT-EOT, "Description", Manufacturer_Name=Microchip, Copyright="Copyright (C) 2025 Ultra Librarian. All rights reserved.", Manufacturer_Part_Number=93LC56BT-E/OT, RefDes=RefDes, Type=Type
U20: "No Description Available", Mfr_Name="Renesas Electronics", RefDes=RefDes, Type=Type
U21: "Description", Manufacturer_Name="Renesas Electronics", Copyright="Copyright (C) 2026 Ultra Librarian. All rights reserved.", Manufacturer_Part_Number=ICL7660SCBAZ-TDKR, RefDes=RefDes, Type=Type
U24 U25 U28 U50: "Four channel unidirectional level shifter", Package=None, Check_prices=https://www.snapeda.com/parts/TXU0104PWR/Texas+Instruments/view-part/?ref=eda, MF="Texas Instruments", MP=TXU0104PWR, SnapEDA_Link=https://www.snapeda.com/parts/TXU0104PWR/Texas+Instruments/view-part/?ref=snap
U30: "No Description Available", Manufacturer_Name=Microchip, Copyright="Copyright (C) 2026 Ultra Librarian. All rights reserved.", Manufacturer_Part_Number=HV9308PJ-G, RefDes=RefDes, Type=Type
U31: "150-mA, 33-V, low-noise, high-PSRR, dual-channel positive & negative low-dropout voltage regulator 10-WSON -40 to 125", Manufacturer_Name="Texas Instruments", Copyright="Copyright (C) 2025 Ultra Librarian. All rights reserved.", Manufacturer_Part_Number=TPS7A3901DSCR, RefDes=RefDes, Type=TYPE
U33: library part AD8802ARUZ-REEL, "12 Channel, 8-Bit TrimDACs with Power Shutdown & Mid-Scale Preset", Manufacturer_Name="Analog Devices Inc", Copyright="Copyright (C) 2026 Ultra Librarian. All rights reserved.", Datasheet=https://www.analog.com/media/en/technical-documentation/data-sheets/AD8802_8804.pdf, Manufacturer_Part_Number=AD8802ARUZ-REEL, RefDes=RefDes, Type=Type
XTAL1: "Description", Manufacturer_Name=SiTime, Copyright="Copyright (C) 2025 Ultra Librarian. All rights reserved.", Manufacturer_Part_Number=SIT1533AI-H4-DCC-32.768E, RefDes=RefDes, Type=Type